# Altium PCB SMPS_PCB.PcbDoc
Units mil, origin at the board's own origin, x right, y up, seen from the top; angles counter-clockwise.
Board outline 2110 x 3425.2 mil, 2 copper layers (Top Layer, Bottom Layer); 23 components, 16 nets, 64 pads, 2 vias.
Unrouted connection lines stored in the file: 1.
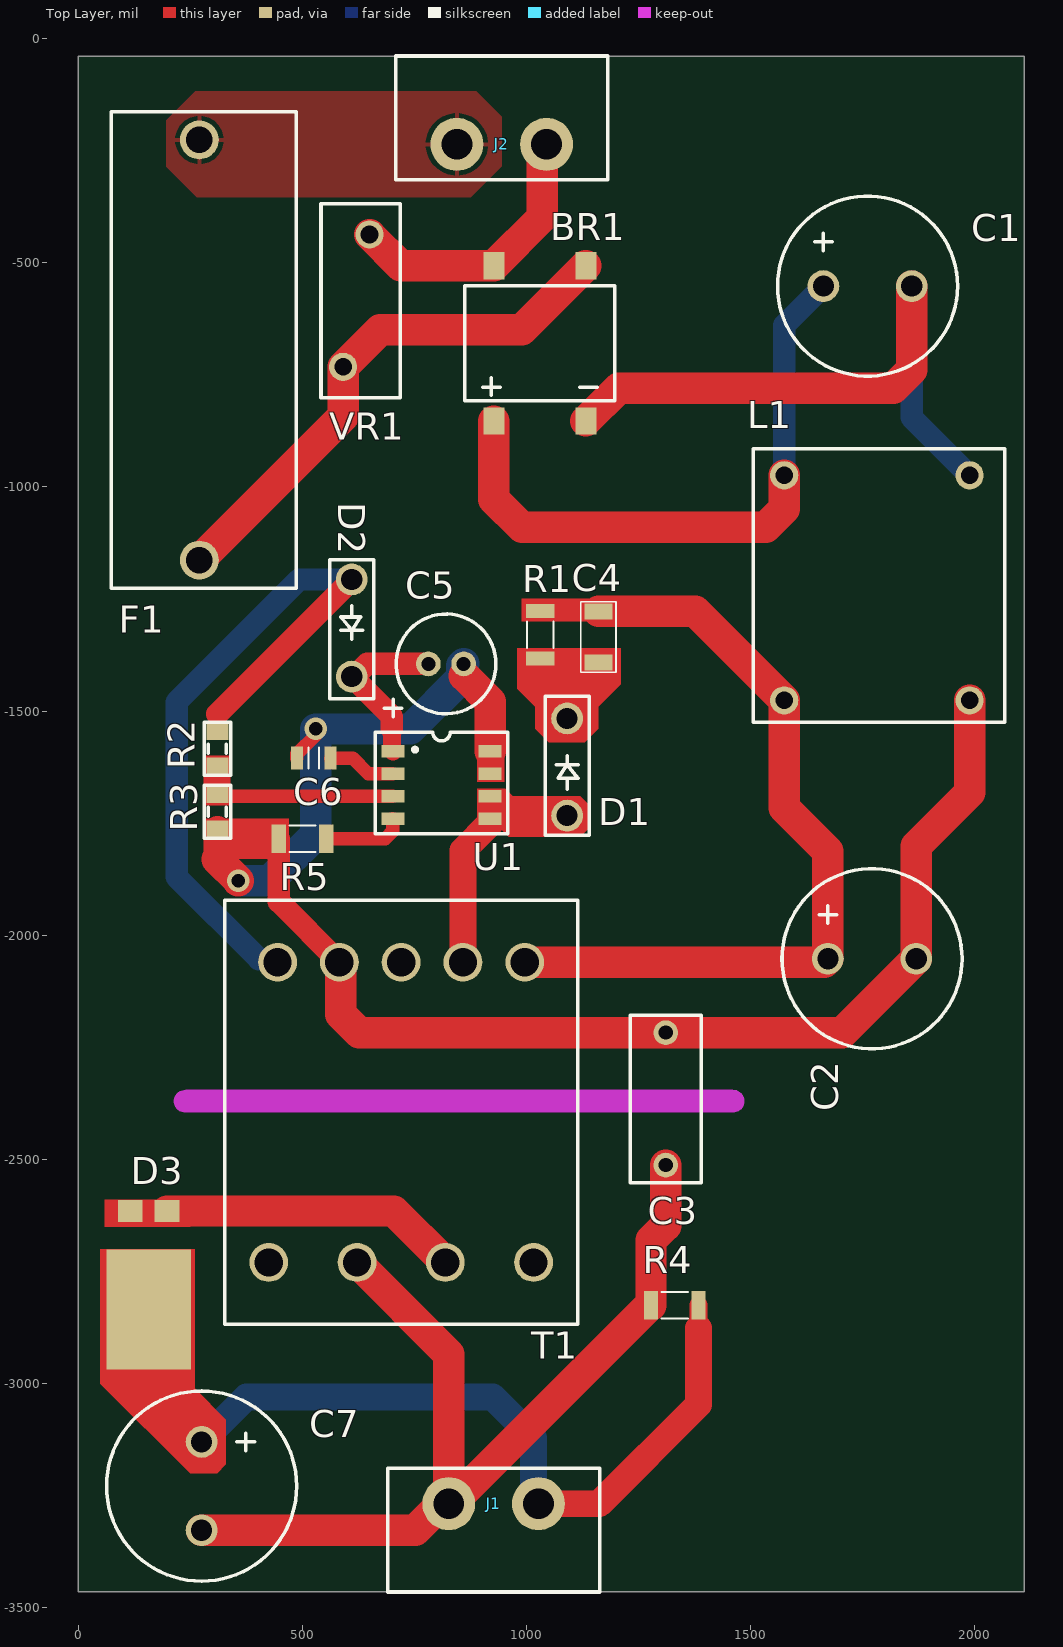
[diagram p0: Top Layer view]
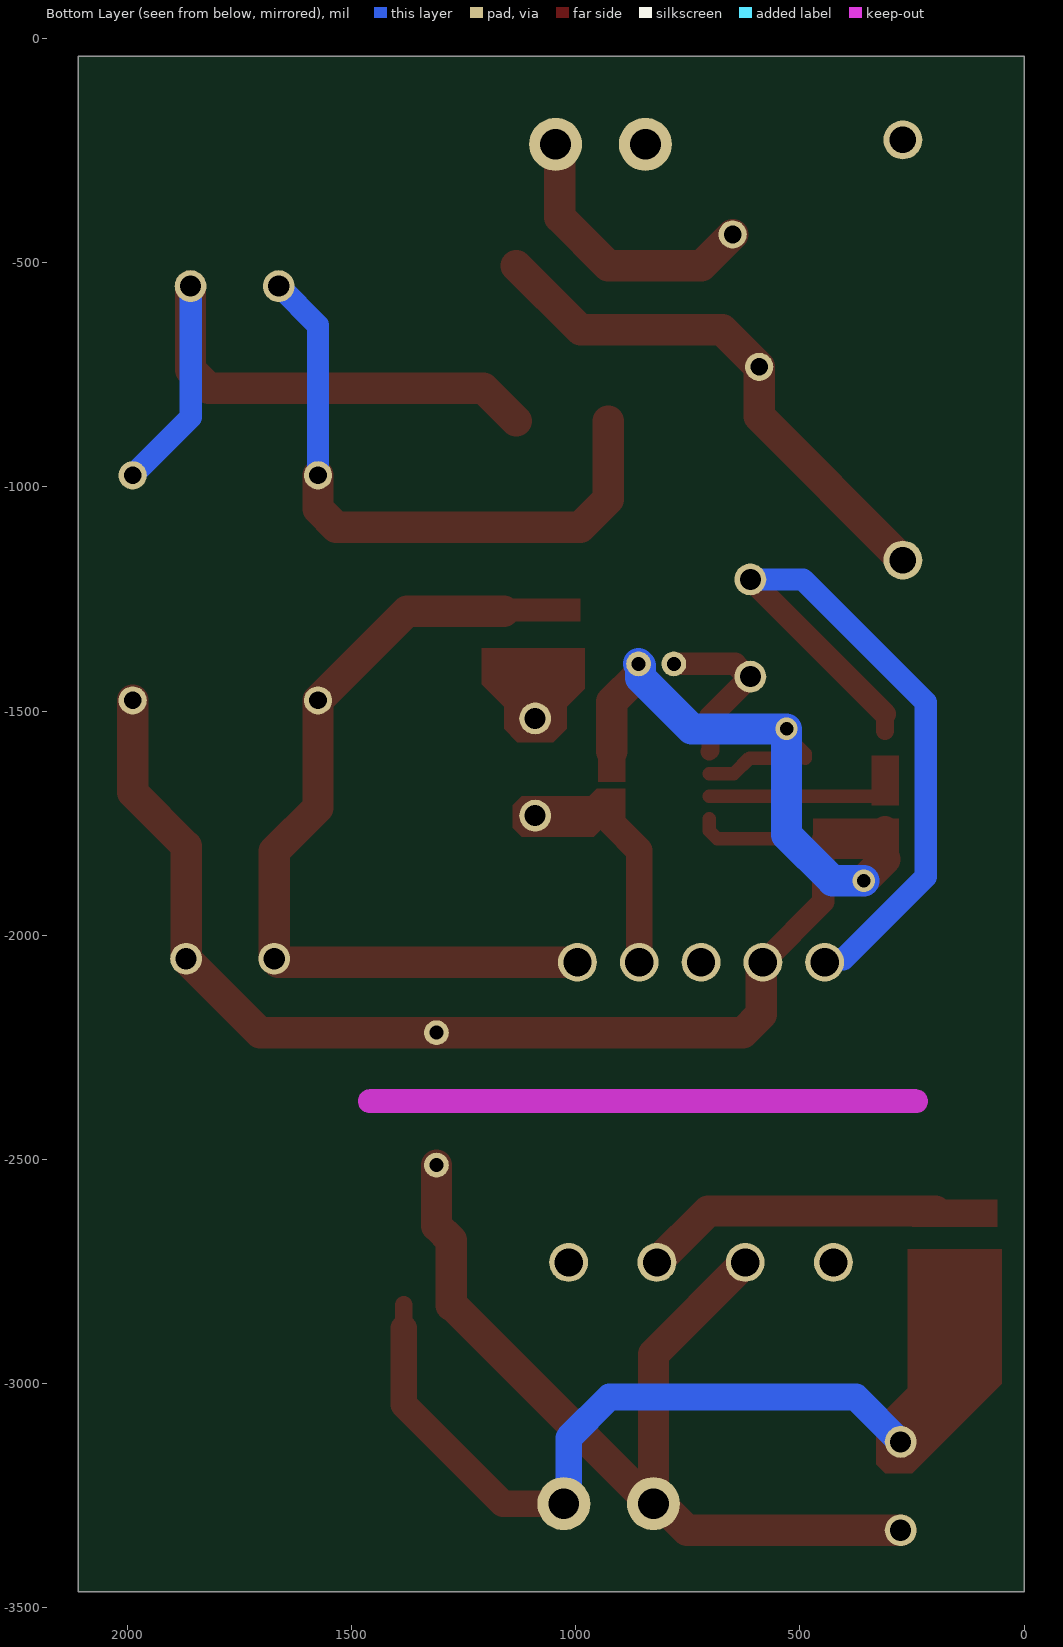
[diagram p1: Bottom Layer view, seen from below]
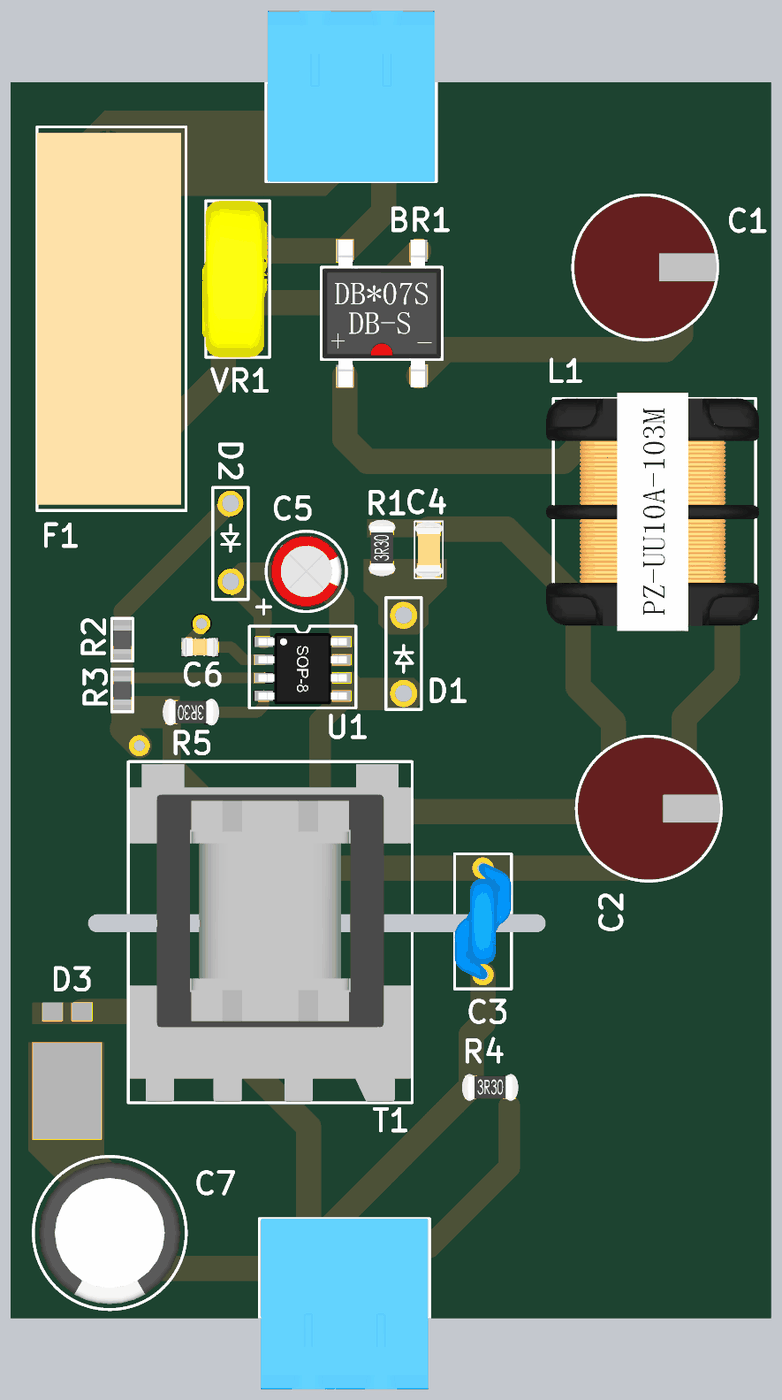
[diagram p2: 3D render of the assembled board from above, using the file's embedded part models]

## Layer stack, top to bottom
Top Solder: solder mask 0.4, Solder Resist, Dk 3.5
Top Layer: signal copper 1.4
Dielectric 1: dielectric 12.6, FR-4, Dk 4.8
Bottom Layer: signal copper 1.4
Bottom Solder: solder mask 0.4, Solder Resist, Dk 3.5

## Board outline
0,-3464.57 2110,-3464.57 2110,-39.37 0,-39.37
cut-out: 240,-2395.02 cw(c240,-2370) 240,-2344.99 1460,-2344.99 cw(c1460,-2370) 1485.01,-2370 cw(c1460,-2370) 1460,-2395.02

## Design rules (kind name [scope] priority, off if disabled: settings)
Clearance [All] p1: gap=11.81 ignorepadtopadclearanceinfootprint=FALSE
PlaneConnect [All] p1: planeconnectstyle=Relief reliefexpansion=40 reliefentries=4 reliefconductorwidth=100 reliefairgap=20
PolygonConnect [All] p1: connectstyle=Relief reliefconductorwidth=20 reliefentries=4 polygonreliefangle="90 Angle" airgapwidth=10
RoutingVias [All] p1: holewidth=28 width=50 viastyle="Through Hole" minholewidth=28 minwidth=50 maxholewidth=28 maxwidth=50
SolderMaskExpansion [All] p1: expansion=4 istentingtop=FALSE
SupplyNets "Schematic Supply Nets_4" [InNet('VOUT-')] p1: voltage=0.000
SupplyNets "Schematic Supply Nets_3" [InNet('IN_GND')] p2: voltage=0.000
SupplyNets "Schematic Supply Nets_2" [InNet('AC_1')] p3: voltage=0.000
SupplyNets "Schematic Supply Nets_1" [InNet('AC_2')] p4: voltage=0.000
Width [All] p1: maxlimit=100 minlimit=11.81 preferedwidth=19.68
29 further rules are at their usual default settings.

## Components (designator, comment, footprint, x,y, rotation, side; value= is the part's Value field where it differs from the comment)
BR1 "DB105STR" DB105STR 1030,-680 r180 top
C1 "UCY2G100MPD1TD" CAP_ALU_10uF 1760.63,-552.44 r0 top value=10uF
C2 "UCY2G150MPD" CAP_ALU_15uF 1770.63,-2052.44 r0 top value=15uF
C3 "DE2E3SA102MN3AT02F" CAP_CER_1000pF_250V_RADİAL 1310.63,-2364.96 r90 top
C4 "C1206C102KDRACTU" CAP_1206 1160.63,-1334.96 r90 top value=1nF
C5 "860010672008" CAP_ALU_4.7uF 820.63,-1394.96 r180 top value=4.7uF
C6 "CL21B104KBCNNNC" CAP_0805 525.61,-1604.96 r180 top value=100nF
C7 "ECA-1AM222" CAP_ALU_2200uF 275.59,-3228.35 r270 top value=2.2mF
D1 "1N4007G-T" "1N4007G-T Diode" 1090.63,-1624.96 r90 top
D2 "1N4007G-T" "1N4007G-T Diode" 610.63,-1314.96 r270 top
D3 "SS10P4-M3/86A SCHOTTKY DİODE" SS10P4-M3/86A 157.48,-2724.8 r180 top
F1 "05200101Z" "05200101Z Fuse Block" 270.63,-694.96 r90 top
J1 "JACK" TBP01R1-508 926.77,-3267.72 r0 top
J2 "JACK" TBP01R1-508 944.88,-236.22 r180 top
L1 "LFU09V-102(0.35MM)" "Line Filter Choke Common Mode" 1771.65,-1220.47 r0 top
R1 "RC1206JR-07200KL" RES-1206 1030.63,-1329.98 r90 top value=200kR
R2 "RMCF0805FT18K0" RES_0805 310.63,-1584.33 r180 top value=18kR
R3 "RC0805FR-7W3K3L" RES_0805 310.63,-1724.96 r180 top value=3.3kR
R4 "RC1206JR-071KL" RES-1206 1330.63,-2824.96 r0 top value=1kR
R5 "RC1206JR-071RL" RES-1206 500.63,-1784.96 r180 top value=1R
T1 "750341599" "SMPS TRAFO" 720.63,-2394.96 r270 top
U1 "UCSR3652SG" sop-8 810.63,-1664.96 r270 top
VR1 "820513011" "820513011 Varistor" 620.63,-584.96 r90 top

## Footprints (in the part's own frame and the unit in brackets; to place one, negate y for a bottom-side part, rotate by r counter-clockwise, add the part's x,y. Pads: shape width x height; smd on the part's side, far side on the other; paste and mask are expansions set on the pad)
"1N4007G-T Diode" [mm] "Rectifier Diode, 1 Phase, 1 Element, 1A, 1000V V(RRM), Silicon, DO-41"
  round 1.8 hole 1.2 mask+0.05: 1(2.75,0) 2(-2.75,0)
  silkscreen extent -3.88,-1.25 4,1.25, body extent -3.32,-0.87 3.16,1.13, height 2.2
"05200101Z Fuse Block" [mm]
  round 2.2 hole 1.5 mask+0.05: 1(-11.9,0) 2(11.9,0)
  silkscreen extent -13.5,-5.5 13.5,5, body extent -13.21,-5.16 13.21,5, height 13.2
"820513011 Varistor" [mm]
  round 1.6 hole 1 mask+0.05: 1(-3.75,0.75) 2(3.75,-0.75)
  silkscreen extent -5.5,-2.5 5.5,2, body extent -5.5,-2.35 5.5,2.25, height 14.5
CAP_0805 [mm]
  rect 0.7x1.3 smd mask+0.05: 1(-0.95,0) 2(0.95,0)
  silkscreen extent -0.3,-0.6 0.3,0.6, body extent -1.3,-0.68 1.3,0.68, height 0.9
CAP_1206 [mm]
  rect 0.9x1.6 smd mask+0.05: 1(-1.45,0) 2(1.45,0)
  silkscreen extent -2,-1 2,1, body extent -1.97,-0.98 1.97,0.98, height 1.3
CAP_ALU_4.7uF [mm] "Aluminum Electrolytic Capacitor, Polarized, Aluminum (wet), 400V, 20% +Tol, 20% -Tol, 10uF"
  round 1.4 hole 0.8 mask+0.05: 1(1,0) 2(-1,0)
  silkscreen extent -2.83,-2.83 3.5,3, body extent -2.49,-2.5 2.5,2.5, height 11.39
CAP_ALU_10uF [mm] "Aluminum Electrolytic Capacitor, Polarized, Aluminum (wet), 400V, 20% +Tol, 20% -Tol, 10uF"
  round 1.8 hole 1.2 mask+0.05: 1(-2.5,0) 2(2.5,0)
  silkscreen extent -5.1,-5.1 5.1,5.1, body extent -5.02,-5 5.02,5, height 17.52
CAP_ALU_15uF [mm] "Aluminum Electrolytic Capacitor, Polarized, Aluminum (wet), 400V, 20% +Tol, 20% -Tol, 15uF"
  round 1.8 hole 1.2 mask+0.05: 1(-2.5,0) 2(2.5,0)
  silkscreen extent -5.1,-5.1 5.1,5.1, body extent -5.02,-5 5.02,5, height 17.52
CAP_ALU_2200uF [mm] "Aluminum Electrolytic Capacitor, Polarized, Aluminum (wet), 10V, 20% +Tol, 20% -Tol, 2200uF, Through Hole Mount"
  round 1.8 hole 1.2 mask+0.05: 1(-2.5,0) 2(2.5,0)
  silkscreen extent -5.39,-5.39 5.39,5.39, body extent -4.98,-5 5,5, height 20.5
CAP_CER_1000pF_250V_RADİAL [mm] "Ceramic Capacitor, Ceramic, 20% +Tol, 20% -Tol, E, -55/+20% TC, 0.001uF, Through Hole Mount"
  round 1.4 hole 0.8 mask+0.05: 1(-3.75,0) 2(3.75,0)
  silkscreen extent -4.75,-2 4.75,2, body extent -4.07,-2 4.07,2, height 9.32
DB105STR [mm]
  rect 1.2x1.55 smd mask+0.05: 1(-2.605,-4.4) 2(2.605,-4.4) 3(2.605,4.4) 4(-2.605,4.4)
  silkscreen extent -4.25,-3.25 4.25,3.25, body extent -4.16,-5.2 4.16,5.2, height 2.66
"Line Filter Choke Common Mode" [mm]
  round 1.6 hole 1 mask+0.05: 1(-5,6.25) 2(5.5,6.25) 3(5.5,-6.5) 4(-5,-6.5)
  silkscreen extent -6.75,-7.75 7.5,7.75, body extent -7.25,-8.63 7.75,8.16, height 16.3
RES-1206 [mm]
  rect 0.8x1.6 smd mask+0.05: 1(-1.345,0) 2(1.345,0)
  silkscreen extent -0.75,-0.75 0.75,0.75, body extent -1.98,-0.94 1.98,0.94, height 0.55
RES_0805 [mm]
  rect 1.25x1 smd mask+0.05: 1(0,1) 2(0,-1)
  silkscreen extent -0.75,-1.5 0.75,1.5, body extent -0.63,-1 0.63,1, height 0.49
"SMPS TRAFO" [mm]
  round 2.2 hole 1.6 mask+0.05: 1(-8.5,7) 2(-8.5,3.5) 3(-8.5,0) 4(-8.5,-3.5) 5(-8.5,-7) 6(8.5,-7.5) 7(8.5,-2.5) 8(8.5,2.5) 9(8.5,7.5)
  silkscreen extent -12,-10 12,10, body extent -11.85,-9.9 11.95,9.9, height 14.85
sop-8 [mm]
  rect 0.7x1.3 smd mask+0.05: 1(-1.905,-2.75) 2(-0.635,-2.75) 3(0.635,-2.75) 4(1.905,-2.75) 5(1.905,2.75) 6(0.635,2.75) 7(-0.635,2.75) 8(-1.905,2.75)
  silkscreen extent -3,-3.75 2.75,3.75, body extent -2.5,-3.1 2.5,3.1, height 1.84
SS10P4-M3/86A [mm] "Rectifier Diode, Schottky, 1 Phase, 1 Element, 10A, 40V V(RRM), Silicon, TO-277A"
  rect 1.4x1.27 smd mask+0.05: 1(-1.04,-2.79) 2(1.04,-2.79)
  rect 4.8x6.8 smd mask+0.05: K(0,2.79)
  body extent -2.5,-3.5 2.5,6.5, height 1
TBP01R1-508 [mm]
  round 3 hole 1.75 mask+0.05: 1(-2.54,0) 2(2.54,0)
  silkscreen extent -6,-5 6,2, body extent -5.88,-10 5.88,2, height 8.6

## Part data
BR1: "Bridge Rect 1PHASE 600V 1A Db-s", Current=1A, Manufacturer="Sangdest Microelectronics", Manufacturer Part Number=DB105S, Supplier Part Number=1655-DB105SCT-ND, Voltage - Peak Reverse (Max)=600V, Category=Uncategorized, ComponentLink1Description=DATASHEET, ComponentLink1URL=https://www.smc-diodes.com/propdf/DB101S%20THRU%20DB107S%20N1459%20REV.B.pdf, Designed by=Kerem, Pricing="1=0,44, 10=0,267, 100=0,1688, 500=0,12602 (USD)", RoHS=No, Stock=8973, Supplier=Digikey
C1: library part CAP_ALU_10uF, "Aluminum Electrolytic Capacitor, Polarized, Aluminum (wet), 400V, 20% +Tol, 20% -Tol, 10uF", Capacitor Type=Aluminium, Manufacturer=Nichicon, Manufacturer Series=CY, Max Operating Temperature=105°C, Min Operating Temperature=-40°C, Package Style=RadialMeter, Rated DC Voltage (URdc)=400V, Ripple Current=150mA, Supplier Part Number=647-UCY2G100MPD1TD, Tolerance  (fill in as +-)=20%, Category="Aluminum Electrolytic Capacitors", ComponentLink1Description=https://datasheet.ciiva.com:443/pdfs/VipMasterIC/IC/NICH/NICH-S-A0009255900/NICH-S-A0009255900-1.pdf?src-supplier=IHS+Markit, ComponentLink1URL=https://datasheet.ciiva.com:443/pdfs/VipMasterIC/IC/NICH/NICH-S-A0009255900/NICH-S-A0009255900-1.pdf?src-supplier=IHS+Markit, ComponentLink2Description=https://datasheet.ciiva.com/29547/e-cy-29547366.pdf?src-supplier=Digikey, ComponentLink2URL=https://datasheet.ciiva.com/29547/e-cy-29547366.pdf?src-supplier=Digikey, ComponentLink3Description=https://datasheet.ciiva.com/29547/e-cy-29547367.pdf?src-supplier=Digikey, ComponentLink3URL=https://datasheet.ciiva.com/29547/e-cy-29547367.pdf?src-supplier=Digikey, Diameter=10mm, Dielectric Material=Aluminium, Length=16mm, Manufacturer Part Number=UCY2G100MPD1TD, Packaging="Tape and Reel", Pins=2, Polarity=Polarized, Pricing="1=1,07, 10=0,539, 50=0,539, 100=0,486, 1000=0,351, 10000=0,295 (USD)", Reach SVHC Compliant=No, RoHS=Yes, RoHS Compliant=Yes, Series=CY, Stock=11094, Supplier=Mouser, Terminal Pitch=5mm, Tolerance (fill in as +-)=20%
C2: library part CAP_ALU_15uF, "Aluminum Electrolytic Capacitor, Polarized, Aluminum (wet), 400V, 20% +Tol, 20% -Tol, 15uF", Capacitor Type=Aluminium, Manufacturer=Nichicon, Max Operating Temperature=105°C, Min Operating Temperature=-40°C, Package Style=RadialMeter, Rated DC Voltage (URdc)=400V, Ripple Current=180mA, Supplier Part Number=647-UCY2G150MPD, Tolerance  (fill in as +-)=20%, Category="Aluminum Electrolytic Capacitors", ComponentLink1Description=https://datasheet.ciiva.com:443/pdfs/VipMasterIC/IC/NICH/NICH-S-A0003527728/NICH-S-A0003527728-1.pdf?src-supplier=IHS+Markit, ComponentLink1URL=https://datasheet.ciiva.com:443/pdfs/VipMasterIC/IC/NICH/NICH-S-A0003527728/NICH-S-A0003527728-1.pdf?src-supplier=IHS+Markit, ComponentLink2Description=https://datasheet.ciiva.com/114/e-cy-114566.pdf?src-supplier=Digikey, ComponentLink2URL=https://datasheet.ciiva.com/114/e-cy-114566.pdf?src-supplier=Digikey, ComponentLink3Description=https://datasheet.ciiva.com/11686/e-cy-11686537.pdf?src-supplier=Avnet, ComponentLink3URL=https://datasheet.ciiva.com/11686/e-cy-11686537.pdf?src-supplier=Avnet, ComponentLink4Description=https://datasheet.ciiva.com/5329/e-cy-8386-5329868.pdf?src-supplier=Mouser, ComponentLink4URL=https://datasheet.ciiva.com/5329/e-cy-8386-5329868.pdf?src-supplier=Mouser, Diameter=10mm, Dielectric Material=Aluminium, JESD-609 Code=e3, Length=20mm, Manufacturer Part Number=UCY2G150MPD, Packaging=Bulk, Pins=2, Polarity=Polarized, Pricing="1=1,25, 10=0,861, 50=0,861, 100=0,632, 1000=0,491, 10000=0,425 (USD)", Reach SVHC Compliant=No, RoHS=Yes, RoHS Compliant=Yes, Stock=1314, Supplier=Mouser, Terminal Finish=Copper, Terminal Pitch=5mm, Tolerance (fill in as +-)=20%
C3: library part CAP_CER_1000pF_250V_RADİAL, "Ceramic Capacitor, Ceramic, 20% +Tol, 20% -Tol, E, -55/+20% TC, 0.001uF, Through Hole Mount", Capacitor Type=Ceramic, Manufacturer=Murata, Supplier Part Number=81-DE2E3SA102MN3AT2F, Category="Ceramic Capacitors", ComponentLink1Description=https://psearch.en.murata.com:443/capacitor/product/DE2E3SA102MN3AT02F.pdf?src-supplier=IHS+Markit, ComponentLink1URL=https://psearch.en.murata.com:443/capacitor/product/DE2E3SA102MN3AT02F.pdf?src-supplier=IHS+Markit, ComponentLink2Description=https://search.murata.co.jp/Ceramy/image/img/A01X/G101/ENG/DE2_SA_T0_F_E.pdf?src-supplier=Digikey, ComponentLink2URL=https://search.murata.co.jp/Ceramy/image/img/A01X/G101/ENG/DE2_SA_T0_F_E.pdf?src-supplier=Digikey, ComponentLink3Description=https://datasheet.octopart.com/DE2E3SA102MN3AT02F-Murata-datasheet-166166228.pdf?src-supplier=TME, ComponentLink3URL=https://datasheet.octopart.com/DE2E3SA102MN3AT02F-Murata-datasheet-166166228.pdf?src-supplier=TME, Dielectric Material=Ceramic, Manufacturer Part Number=DE2E3SA102MN3AT02F, Pins=2, Pricing="1=0,49, 10=0,297, 50=0,297, 100=0,145, 1000=0,11, 10000=0,109 (USD)", Reach SVHC Compliant=Yes, RoHS=Yes, RoHS Compliant=Yes, Stock=12396, Supplier=Mouser
C4: library part CAP_CER_1nF_1206, "Ceramic Capacitor, Multilayer, Ceramic, 1000V, 10% +Tol, 10% -Tol, X7R, 15% TC, 0.001uF, Surface Mount, 1206", Capacitor Type=Ceramic, Case/Package=1206, Manufacturer=KEMET, Max Operating Temperature=125°C, Min Operating Temperature=-55°C, Package Shape=Rectangular, Package Style=SMTMeter, Rated DC Voltage (URdc)=1kV, Supplier Part Number=80-C1206C102KDR, Temperature Characteristics Code=X7R, Tolerance  (fill in as +-)=10%, Category="Ceramic Capacitors", ComponentLink1Description=https://datasheet.ciiva.com:443/pdfs/VipMasterIC/IC/KEME/KEME-S-A0007630859/KEME-S-A0007630859-1.pdf?src-supplier=IHS+Markit, ComponentLink1URL=https://datasheet.ciiva.com:443/pdfs/VipMasterIC/IC/KEME/KEME-S-A0007630859/KEME-S-A0007630859-1.pdf?src-supplier=IHS+Markit, ComponentLink2Description=https://datasheet.ciiva.com/19476/1567931-19476446.pdf?src-supplier=Jameco, ComponentLink2URL=https://datasheet.ciiva.com/19476/1567931-19476446.pdf?src-supplier=Jameco, ComponentLink3Description=https://datasheet.ciiva.com/22700/1812017-22700535.pdf?src-supplier=Element14, ComponentLink3URL=https://datasheet.ciiva.com/22700/1812017-22700535.pdf?src-supplier=Element14, ComponentLink4Description=https://datasheet.ciiva.com/28610/1918693-28610894.pdf?src-supplier=Element14, ComponentLink4URL=https://datasheet.ciiva.com/28610/1918693-28610894.pdf?src-supplier=Element14, Dielectric Material=Ceramic, Height=1.2mm, JESD-609 Code=e3, Length=3.2mm, Manufacturer Part Number=C1206C102KDRACTU, Mounting Technology="Surface Mount", Multilayer=Yes, Packaging="Tape and Reel", Pins=2, Pricing="1=0,23, 10=0,114, 50=0,114, 100=0,068, 1000=0,049, 10000=0,036 (USD)", Reach SVHC Compliant=Yes, RoHS=Yes, RoHS Compliant=Yes, Stock=27008, Supplier=Mouser, Terminal Finish=Nickel, Termination=Wraparound, Tolerance (fill in as +-)=10%, Width=1.6mm
C5: library part CAP_ALU_4.7uF, "Aluminum Electrolytic Capacitor, Aluminum (wet)", Capacitor Type=Aluminium, Manufacturer="Wurth Electronics", Supplier Part Number=710-860010672008, Category="Aluminum Electrolytic Capacitors", ComponentLink1Description=https://datasheet.ciiva.com:443/pdfs/VipMasterIC/IC/MIDC/MIDC-S-A0000765238/MIDC-S-A0000765796-1.pdf?src-supplier=IHS+Markit, ComponentLink1URL=https://datasheet.ciiva.com:443/pdfs/VipMasterIC/IC/MIDC/MIDC-S-A0000765238/MIDC-S-A0000765796-1.pdf?src-supplier=IHS+Markit, ComponentLink2Description=http://www.farnell.com/datasheets/1879575.pdf?src-supplier=Farnell, ComponentLink2URL=http://www.farnell.com/datasheets/1879575.pdf?src-supplier=Farnell, ComponentLink3Description=http://www.produktinfo.conrad.com/datenblaetter/1200000-1299999/001280181-da-01-en-WCAP_ATG8_ALU_ELEC_CAPS_860010672008.pdf?src-supplier=Conrad, ComponentLink3URL=http://www.produktinfo.conrad.com/datenblaetter/1200000-1299999/001280181-da-01-en-WCAP_ATG8_ALU_ELEC_CAPS_860010672008.pdf?src-supplier=Conrad, ComponentLink4Description=http://katalog.we-online.de/pbs/datasheet/860010672008.pdf?src-supplier=Digikey, ComponentLink4URL=http://katalog.we-online.de/pbs/datasheet/860010672008.pdf?src-supplier=Digikey, ComponentLink5Description=http://www.farnell.com/datasheets/1879575.pdf?src-supplier=Element14, ComponentLink5URL=http://www.farnell.com/datasheets/1879575.pdf?src-supplier=Element14, Dielectric Material=Aluminium, Manufacturer Part Number=860010672008, Pins=2, Pricing="1=0,11, 10=0,11, 50=0,096, 100=0,084, 1000=0,056, 10000=0,055 (USD)", Reach SVHC Compliant=Yes, RoHS=Yes, RoHS Compliant=Yes, Stock=5183, Supplier=Mouser
C6: library part CAP_CER_0.1uF_0805, "Ceramic Capacitor,50V, %10, 0.1uF, Surface Mount, 0805", Capacitor Type=Ceramic, Case/Package=0805, Manufacturer=Samsung, Max Operating Temperature=125°C, Min Operating Temperature=-55°C, Package Shape=Rectangular, Package Style=SMTMeter, Rated DC Voltage (URdc)=50V, Supplier Part Number=1276-1003-1-ND, Temperature Characteristics Code=X7R, Tolerance  (fill in as +-)=10%, Category="Ceramic Capacitors", ComponentLink1Description=https://datasheet.ciiva.com:443/pdfs/VipMasterIC/IC/SEMS/SEMS-S-A0008521003/SEMS-S-A0008521039-1.pdf?src-supplier=IHS+Markit, ComponentLink1URL=https://datasheet.ciiva.com:443/pdfs/VipMasterIC/IC/SEMS/SEMS-S-A0008521003/SEMS-S-A0008521039-1.pdf?src-supplier=IHS+Markit, ComponentLink2Description=https://datasheet.ciiva.com/25710/cl21b104kbcnnnc-25710182.pdf?src-supplier=Digikey, ComponentLink2URL=https://datasheet.ciiva.com/25710/cl21b104kbcnnnc-25710182.pdf?src-supplier=Digikey, ComponentLink3Description=https://datasheet.ciiva.com/29199/454152-da-01-en-vs-kondensator-0805-29199814.pdf?src-supplier=Conrad, ComponentLink3URL=https://datasheet.ciiva.com/29199/454152-da-01-en-vs-kondensator-0805-29199814.pdf?src-supplier=Conrad, Designed by=Kerem, Dielectric Material=Ceramic, Height=0.95mm, JESD-609 Code=e3, Length=2mm, Manufacturer Part Number=CL21B104KBCNNNC, Mounting Technology="Surface Mount", Multilayer=Yes, Packaging="Tape and Reel", Pins=2, Pricing="1=0,1, 10=0,029, 100=0,0175, 1000=0,01156 (USD)", Reach SVHC Compliant=Yes, RoHS=Yes, RoHS Compliant=Yes, Stock=925106, Supplier=Digikey, Terminal Finish=Nickel, Termination=Wraparound, Tolerance (fill in as +-)=10%, Width=1.25mm
C7: library part CAP_ALU_2200uF, "Aluminum Electrolytic Capacitor, Polarized, Aluminum (wet), 10V, 20% +Tol, 20% -Tol, 2200uF, Through Hole Mount", Capacitor Type=Aluminium, Leakage Current=220uA, Manufacturer=Panasonic, Manufacturer Series=M, Max Operating Temperature=85°C, Min Operating Temperature=-40°C, Package Shape=Cylindrical, Package Style=RadialMeter, Rated DC Voltage (URdc)=10V, Ripple Current=920mA, Supplier Part Number=667-ECA-1AM222, Tolerance  (fill in as +-)=20%, Category="Aluminum Electrolytic Capacitors", ComponentLink1Description=https://datasheet.ciiva.com:443/pdfs/VipMasterIC/IC/PANA/PANA-S-A0009459698/PANA-S-A0009459698-1.pdf?src-supplier=IHS+Markit, ComponentLink1URL=https://datasheet.ciiva.com:443/pdfs/VipMasterIC/IC/PANA/PANA-S-A0009459698/PANA-S-A0009459698-1.pdf?src-supplier=IHS+Markit, ComponentLink2Description=https://datasheet.ciiva.com/11780/0900766b80f2e8a9-11780233.pdf?src-supplier=Rs, ComponentLink2URL=https://datasheet.ciiva.com/11780/0900766b80f2e8a9-11780233.pdf?src-supplier=Rs, ComponentLink3Description=https://datasheet.ciiva.com/43458/654936-43458312.pdf?src-supplier=Farnell, ComponentLink3URL=https://datasheet.ciiva.com/43458/654936-43458312.pdf?src-supplier=Farnell, ComponentLink4Description=https://datasheet.ciiva.com/10331/aba0000ce12-10331145.pdf?src-supplier=Avnet, ComponentLink4URL=https://datasheet.ciiva.com/10331/aba0000ce12-10331145.pdf?src-supplier=Avnet, ComponentLink5Description=https://datasheet.ciiva.com/48520/radial-m-eng-tds-48520751.pdf?src-supplier=Distrelec, ComponentLink5URL=https://datasheet.ciiva.com/48520/radial-m-eng-tds-48520751.pdf?src-supplier=Distrelec, ComponentLink6Description=https://datasheet.ciiva.com/30083/49aba0000ce12-30083103.pdf?src-supplier=Onlinecomponents.com, ComponentLink6URL=https://datasheet.ciiva.com/30083/49aba0000ce12-30083103.pdf?src-supplier=Onlinecomponents.com, ComponentLink7Description=https://datasheet.ciiva.com/46387/654936-46387400.pdf?src-supplier=Element14, ComponentLink7URL=https://datasheet.ciiva.com/46387/654936-46387400.pdf?src-supplier=Element14, ComponentLink8Description=https://datasheet.ciiva.com/24027/aba0000ce12-465472-24027112.pdf?src-supplier=Mouser, ComponentLink8URL=https://datasheet.ciiva.com/24027/aba0000ce12-465472-24027112.pdf?src-supplier=Mouser, ComponentLink9Description=https://datasheet.ciiva.com/16395/aba0000ce12-16395615.pdf?src-supplier=Future+Electronics, ComponentLink9URL=https://datasheet.ciiva.com/16395/aba0000ce12-16395615.pdf?src-supplier=Future+Electronics, Diameter=10mm, Dielectric Material=Aluminium, JESD-609 Code=e3, Length=20mm, Manufacturer Part Number=ECA-1AM222, Mounting Technology="Through Hole", Packaging=Bulk, Pins=2, Polarity=Polarized, Pricing="1=0,63, 10=0,297, 50=0,297, 100=0,23, 1000=0,186, 10000=0,167 (USD)", Reach SVHC Compliant=Yes, RoHS=Yes, RoHS Compliant=Yes, Series=ECA-M, Stock=2404, Supplier=Mouser, Tan Delta=0.26, Terminal Finish=Tin, Terminal Pitch=5mm, Termination=Wire, Tolerance (fill in as +-)=20%
D1 D2: library part "1N4007G-T Diode", "Rectifier Diode, 1 Phase, 1 Element, 1A, 1000V V(RRM), Silicon, DO-41", Case Connection=Isolated, Forward Voltage=1V, Manufacturer=Diodes, Max Operating Temperature=175°C, Max Output current=1A, Min Operating Temperature=-65°C, Non-rep Pk Forward Current-Max=30A, Package Body Material=Plastic, Package Shape=Round, Package Style="LONG FORMMeter", Peak Reflow Temperature (Cel)=260°C, Rep Pk Reverse Voltage-Max=1kV, Supplier Part Number=621-1N4007G-T, Time @ Peak Reflow Temperature-Max (s)=40s, Category="Rectifier Diodes", ComponentLink1Description=https://datasheet.ciiva.com:443/pdfs/VipMasterIC/IC/DIOD/DIODS14380/DIODS14380-1.pdf?src-supplier=IHS+Markit, ComponentLink1URL=https://datasheet.ciiva.com:443/pdfs/VipMasterIC/IC/DIOD/DIODS14380/DIODS14380-1.pdf?src-supplier=IHS+Markit, ComponentLink2Description=https://datasheet.ciiva.com/36525/1537942-36525995.pdf?src-supplier=Jameco, ComponentLink2URL=https://datasheet.ciiva.com/36525/1537942-36525995.pdf?src-supplier=Jameco, ComponentLink3Description=https://datasheet.ciiva.com/912/ds29002-912230.pdf?src-supplier=Digikey, ComponentLink3URL=https://datasheet.ciiva.com/912/ds29002-912230.pdf?src-supplier=Digikey, ComponentLink4Description=https://datasheet.ciiva.com/15219/getdatasheetpartid-213960-15219547.pdf?src-supplier=Verical, ComponentLink4URL=https://datasheet.ciiva.com/15219/getdatasheetpartid-213960-15219547.pdf?src-supplier=Verical, ComponentLink5Description=https://datasheet.ciiva.com/16395/ds29002-16395514.pdf?src-supplier=Future+Electronics, ComponentLink5URL=https://datasheet.ciiva.com/16395/ds29002-16395514.pdf?src-supplier=Future+Electronics, Diode Element Material=SILICON, Diode Type=RECTIFIER, JEDEC-95 Code=DO-41, JESD-30 Code=O-PALF-W2, JESD-609 Code=e3, Manufacturer Part Number=1N4007G-T, Number of Elements=1, Pins=2, Pricing="1=0,16, 10=0,097, 50=0,097, 100=0,08, 1000=0,051, 10000=0,05 (USD)", Qualification Status="Not Qualified", Reach SVHC Compliant=No, Reverse Recovery Time-Max=2us, RoHS=Yes, RoHS Compliant=Yes, Stock=124927, Supplier=Mouser, Surface Mount=No, Terminal Finish=Tin, Terminal Form=Wire, Terminal Position=AXIAL
D3: library part SS10P4-M3/86A, "Rectifier Diode, Schottky, 1 Phase, 1 Element, 10A, 40V V(RRM), Silicon, TO-277A", Manufacturer="Vishay Semiconductors", Supplier Part Number=625-SS10P4-M3, Category="Rectifier Diodes", ComponentLink1Description=https://datasheet.ciiva.com:443/pdfs/VipMasterIC/IC/VISH/VISH-S-A0007701170/VISH-S-A0007701170-1.pdf?src-supplier=IHS+Markit, ComponentLink1URL=https://datasheet.ciiva.com:443/pdfs/VipMasterIC/IC/VISH/VISH-S-A0007701170/VISH-S-A0007701170-1.pdf?src-supplier=IHS+Markit, ComponentLink2Description=https://datasheet.ciiva.com/22685/1719836-22685698.pdf?src-supplier=Element14, ComponentLink2URL=https://datasheet.ciiva.com/22685/1719836-22685698.pdf?src-supplier=Element14, ComponentLink3Description=https://datasheet.ciiva.com/4245/ss10p4-4245882.pdf?src-supplier=Arrow+Electronics, ComponentLink3URL=https://datasheet.ciiva.com/4245/ss10p4-4245882.pdf?src-supplier=Arrow+Electronics, ComponentLink4Description=https://datasheet.ciiva.com/911/ss10p4-911286.pdf?src-supplier=Digikey, ComponentLink4URL=https://datasheet.ciiva.com/911/ss10p4-911286.pdf?src-supplier=Digikey, ComponentLink5Description=https://datasheet.ciiva.com/911/ss10p4-911287.pdf?src-supplier=Digikey, ComponentLink5URL=https://datasheet.ciiva.com/911/ss10p4-911287.pdf?src-supplier=Digikey, ComponentLink6Description=https://datasheet.ciiva.com/911/ss10p4-911288.pdf?src-supplier=Digikey, ComponentLink6URL=https://datasheet.ciiva.com/911/ss10p4-911288.pdf?src-supplier=Digikey, ComponentLink7Description=https://datasheet.ciiva.com/16489/ss10p4-16489287.pdf?src-supplier=Future+Electronics, ComponentLink7URL=https://datasheet.ciiva.com/16489/ss10p4-16489287.pdf?src-supplier=Future+Electronics, Manufacturer Part Number=SS10P4-M3/86A, Pricing="1=0,93, 10=0,645, 50=0,645, 100=0,521, 1000=0,284, 10000=0,275 (USD)", RoHS=No, Stock=7172, Supplier=Mouser
F1: library part "05200101Z Fuse Block", "Fuses/Accessories", Manufacturer=Littelfuse, Supplier Part Number=576-05200101Z, Amper=1A, Category="Fuse Holders", ComponentLink1Description=https://datasheet.ciiva.com:443/pdfs/VipMasterIC/IC/LFSI/LFSI-S-A0002252627/LFSI-S-A0002252627-1.pdf?src-supplier=IHS+Markit, ComponentLink1URL=https://datasheet.ciiva.com:443/pdfs/VipMasterIC/IC/LFSI/LFSI-S-A0002252627/LFSI-S-A0002252627-1.pdf?src-supplier=IHS+Markit, ComponentLink2Description=https://datasheet.ciiva.com/19458/1712608-19458493.pdf?src-supplier=Jameco, ComponentLink2URL=https://datasheet.ciiva.com/19458/1712608-19458493.pdf?src-supplier=Jameco, ComponentLink3Description=https://datasheet.ciiva.com/295/520-metricomniblock-295549.pdf?src-supplier=Digikey, ComponentLink3URL=https://datasheet.ciiva.com/295/520-metricomniblock-295549.pdf?src-supplier=Digikey, ComponentLink4Description=https://datasheet.ciiva.com/16300/0105-129-clips-16300344.pdf?src-supplier=Future+Electronics, ComponentLink4URL=https://datasheet.ciiva.com/16300/0105-129-clips-16300344.pdf?src-supplier=Future+Electronics, ComponentLink5Description=https://datasheet.ciiva.com/15187/getdatasheetpartid-115097-15187901.pdf?src-supplier=Verical, ComponentLink5URL=https://datasheet.ciiva.com/15187/getdatasheetpartid-115097-15187901.pdf?src-supplier=Verical, ComponentLink6Description=https://datasheet.ciiva.com/4480/520-metricomniblock-4480158.pdf?src-supplier=Mouser, ComponentLink6URL=https://datasheet.ciiva.com/4480/520-metricomniblock-4480158.pdf?src-supplier=Mouser, Manufacturer Part Number=05200101Z, Pricing="1=1,6, 10=1,12, 50=0,908, 100=0,863, 1000=0,718, 10000=0,679 (USD)", RoHS=Yes, Stock=10761, Supplier=Mouser
J1 J2: library part TBP01R1-508-02BE, "Strip Terminal Block 2 Pins", Manufacturer="CUI Devices", Supplier Part Number=102-6406-ND, Category="Terminal Blocks", ComponentLink1Description=https://www.cuidevices.com/product/resource/digikeypdf/tbp01r1-508.pdf?src-supplier=Digikey, ComponentLink1URL=https://www.cuidevices.com/product/resource/digikeypdf/tbp01r1-508.pdf?src-supplier=Digikey, ComponentLink2Description=https://datasheet.octopart.com/TBP01R1-508-02BE-CUI-Devices-datasheet-147843976.pdf?src-supplier=Future+Electronics, ComponentLink2URL=https://datasheet.octopart.com/TBP01R1-508-02BE-CUI-Devices-datasheet-147843976.pdf?src-supplier=Future+Electronics, ComponentLink3Description=https://datasheet.octopart.com/TBP01R1-508-02BE-CUI-Devices-datasheet-154730754.pdf?src-supplier=Electro+Sonic, ComponentLink3URL=https://datasheet.octopart.com/TBP01R1-508-02BE-CUI-Devices-datasheet-154730754.pdf?src-supplier=Electro+Sonic, Designed by=Kerem, Manufacturer Part Number=TBP01R1-508-02BE, Pricing="1=0,47, 10=0,218, 25=0,1684, 50=0,1412, 100=0,121, 400=0,09438, 800=0,08583, 1200=0,08184, 5200=0,0775 (USD)", RoHS=Yes, Stock=90039, Supplier=Digikey
L1: library part "Line Filter Choke Common Mode"
R1: library part "RES_200K OHM_1206", "Fixed Resistor, Metal Glaze/thick Film, 0.25W, 200000ohm, 200V, 5% +/-Tol, 100ppm/Cel, Surface Mount, 1206", Case/Package=1206, Manufacturer=Yageo, Max Operating Temperature=155°C, Min Operating Temperature=-55°C, Package Height=0.55mm, Package Length=3.1mm, Package Shape=Rectangular, Package Width=1.6mm, Power=250mW, Rated Temperature=70°C, Resistor Type="FIXED RESISTOR", Temperature Coefficient (ppm/Cel)=100, Tolerance=5%, Working Voltage=200V, Additional Feature="LASER TRIMMABLE", Category="Chip SMD Resistors", ComponentLink1Description=https://datasheet.ciiva.com:443/pdfs/VipMasterIC/IC/YAGO/YAGO-S-A0008145938/YAGO-S-A0008145938-1.pdf?src-supplier=IHS+Markit, ComponentLink1URL=https://datasheet.ciiva.com:443/pdfs/VipMasterIC/IC/YAGO/YAGO-S-A0008145938/YAGO-S-A0008145938-1.pdf?src-supplier=IHS+Markit, ComponentLink2Description=https://datasheet.ciiva.com/2520/pyu-r-int-thick-7-2520646.pdf?src-supplier=Digikey, ComponentLink2URL=https://datasheet.ciiva.com/2520/pyu-r-int-thick-7-2520646.pdf?src-supplier=Digikey, ComponentLink3Description=https://datasheet.ciiva.com/16746/pyu-rc1206-51-rohs-l-4-16746043.pdf?src-supplier=Future+Electronics, ComponentLink3URL=https://datasheet.ciiva.com/16746/pyu-rc1206-51-rohs-l-4-16746043.pdf?src-supplier=Future+Electronics, ComponentLink4Description=https://datasheet.ciiva.com/2520/pyu-r-int-thick-7-2520645.pdf?src-supplier=Digikey, ComponentLink4URL=https://datasheet.ciiva.com/2520/pyu-r-int-thick-7-2520645.pdf?src-supplier=Digikey, Construction=Chip, JESD-609 Code=e3, Manufacturer Part Number=RC1206JR-07200KL, Mounting Technology="Surface Mount", Packaging="Tape and Reel", Pins=2, Pricing="5000=0,00353, 10000=0,00345, 20000=0,00338, 30000=0,00331, 40000=0,00326 (USD)", Reach SVHC Compliant=Yes, RoHS=Yes, RoHS Compliant=Yes, Stock=5000, Supplier=Avnet, Supplier Part Number=RC1206JR-07200KL, Technology="METAL GLAZE/THICK FILM", Terminal Finish=Nickel, Termination=Wraparound
R2: library part "RES_18K OHM_0805", "Fixed Resistor, Metal Glaze/thick Film, 0.125W, 18000ohm, 150V, 1% +/-Tol, 100ppm/Cel, Surface Mount, 0805", Case/Package=0805, Manufacturer="Stackpole Electronics", Max Operating Temperature=155°C, Min Operating Temperature=-55°C, Package Height=0.5mm, Package Length=2mm, Package Shape=Rectangular, Package Width=1.25mm, Power=125mW, Rated Temperature=70°C, Resistor Type="FIXED RESISTOR", Temperature Coefficient (ppm/Cel)=100, Tolerance=1%, Working Voltage=150V, Category="Chip SMD Resistors", ComponentLink1Description=https://datasheet.ciiva.com:443/pdfs/VipMasterIC/IC/SEIE/SEIE-S-A0009541969/SEIE-S-A0009541969-1.pdf?src-supplier=IHS+Markit, ComponentLink1URL=https://datasheet.ciiva.com:443/pdfs/VipMasterIC/IC/SEIE/SEIE-S-A0009541969/SEIE-S-A0009541969-1.pdf?src-supplier=IHS+Markit, ComponentLink2Description=http://www.seielect.com/Catalog/SEI-RMCF_RMCP.pdf?src-supplier=Digikey, ComponentLink2URL=http://www.seielect.com/Catalog/SEI-RMCF_RMCP.pdf?src-supplier=Digikey, ComponentLink3Description=https://www.seielect.com/catalog/sei-rmcf_rmcp.pdf?src-supplier=Digikey, ComponentLink3URL=https://www.seielect.com/catalog/sei-rmcf_rmcp.pdf?src-supplier=Digikey, ComponentLink4Description=https://www.seielect.com/catalog/SEI-RMCF_RMCP.pdf?src-supplier=Avnet, ComponentLink4URL=https://www.seielect.com/catalog/SEI-RMCF_RMCP.pdf?src-supplier=Avnet, ComponentLink5Description=https://datasheet.octopart.com/RMCF0805FT18K0-Stackpole-Electronics-datasheet-12534581.pdf?src-supplier=Future+Electronics, ComponentLink5URL=https://datasheet.octopart.com/RMCF0805FT18K0-Stackpole-Electronics-datasheet-12534581.pdf?src-supplier=Future+Electronics, ComponentLink6Description=https://datasheet.octopart.com/RMCF0805FT18K0-Stackpole-Electronics-datasheet-141193804.pdf?src-supplier=Master+Electronics, ComponentLink6URL=https://datasheet.octopart.com/RMCF0805FT18K0-Stackpole-Electronics-datasheet-141193804.pdf?src-supplier=Master+Electronics, Construction=Rectangular, JESD-609 Code=e3, Manufacturer Part Number=RMCF0805FT18K0, Mounting Technology="Surface Mount", Packaging="Tape and Reel", Pins=2, Pricing="5000=0,00245, 10000=0,00241, 20000=0,00238, 30000=0,00234, 40000=0,0023 (USD)", Reach SVHC Compliant=Yes, Reference Standard=AEC-Q200, RoHS=Yes, RoHS Compliant=Yes, Stock=15000, Supplier=Avnet, Supplier Part Number=RMCF0805FT18K0, Technology="METAL GLAZE/THICK FILM", Terminal Finish=Nickel, Termination=Wraparound
R3: library part "RES_3K3 OHM_0805", "3.3 kOhms ±1% 0.25W, 1/4W Chip Resistor 0805 (2012 Metric) Moisture Resistant Thick Film", Case/Package=0805, Manufacturer=Yageo, Max Operating Temperature=155°C, Min Operating Temperature=-55°C, Package Height=0.5mm, Package Length=2mm, Package Shape=Rectangular, Package Width=1.25mm, Power=250mW, Rated Temperature=70°C, Resistor Type="FIXED RESISTOR", Supplier Part Number=603-RC0805FR-7W3K3L, Temperature Coefficient (ppm/Cel)=200, Tolerance=1%, Working Voltage=150V, Additional Feature="LASER TRIMMABLE", Category="Chip SMD Resistors", ComponentLink1Description=https://datasheet.ciiva.com:443/pdfs/VipMasterIC/IC/YAGO/YAGO-S-A0008145938/YAGO-S-A0008145938-1.pdf?src-supplier=IHS+Markit, ComponentLink1URL=https://datasheet.ciiva.com:443/pdfs/VipMasterIC/IC/YAGO/YAGO-S-A0008145938/YAGO-S-A0008145938-1.pdf?src-supplier=IHS+Markit, Construction=Chip, JESD-609 Code=e3, Manufacturer Part Number=RC0805FR-7W3K3L, Mounting Technology="Surface Mount", Packaging="Tape and Reel", Pins=2, Pricing="1=0,12, 10=0,057, 50=0,057, 100=0,044, 1000=0,031, 10000=0,016 (USD)", Reach SVHC Compliant=Yes, RoHS=Yes, RoHS Compliant=Yes, Stock=4448, Supplier=Mouser, Technology="METAL GLAZE/THICK FILM", Terminal Finish=Nickel, Termination=Wraparound
R4: library part "RES_1K OHM_1206", "Fixed Resistor, Metal Glaze/thick Film, 0.25W, 1000ohm, 200V, 5% +/-Tol, 100ppm/Cel, Surface Mount, 1206", Case/Package=1206, Manufacturer=Yageo, Max Operating Temperature=155°C, Min Operating Temperature=-55°C, Package Height=0.55mm, Package Length=3.1mm, Package Shape=Rectangular, Package Width=1.6mm, Power=250mW, Rated Temperature=70°C, Resistor Type="FIXED RESISTOR", Supplier Part Number=4749537, Temperature Coefficient (ppm/Cel)=100, Tolerance=5%, Working Voltage=200V, Additional Feature="LASER TRIMMABLE", Category="Chip SMD Resistors", ComponentLink1Description=https://datasheet.ciiva.com:443/pdfs/VipMasterIC/IC/YAGO/YAGO-S-A0008145938/YAGO-S-A0008145938-1.pdf?src-supplier=IHS+Markit, ComponentLink1URL=https://datasheet.ciiva.com:443/pdfs/VipMasterIC/IC/YAGO/YAGO-S-A0008145938/YAGO-S-A0008145938-1.pdf?src-supplier=IHS+Markit, ComponentLink2Description=https://datasheet.ciiva.com/2458/pyu-r-int-thick-7-2458671.pdf?src-supplier=Digikey, ComponentLink2URL=https://datasheet.ciiva.com/2458/pyu-r-int-thick-7-2458671.pdf?src-supplier=Digikey, Construction=Chip, JESD-609 Code=e3, Manufacturer Part Number=RC1206JR-071KL, Mounting Technology="Surface Mount", Packaging="Tape and Reel", Pins=2, Pricing="5000=0,0029, 25000=0,0028, 100000=0,0027, 250000=0,0026, 625000=0,0025 (USD)", Reach SVHC Compliant=Yes, RoHS=Yes, RoHS Compliant=Yes, Stock=780000, Supplier="Future Electronics", Technology="METAL GLAZE/THICK FILM", Terminal Finish=Nickel, Termination=Wraparound
R5: library part "RES_1 OHM_1206", "Fixed Resistor, Metal Glaze/thick Film, 0.25W, 1ohm, 200V, 5% +/-Tol, 200ppm/Cel, Surface Mount, 1206", Case/Package=1206, Manufacturer=Yageo, Max Operating Temperature=155°C, Min Operating Temperature=-55°C, Package Height=0.55mm, Package Length=3.1mm, Package Shape=Rectangular, Package Width=1.6mm, Power=250mW, Rated Temperature=70°C, Resistor Type="FIXED RESISTOR", Supplier Part Number=5918024, Temperature Coefficient (ppm/Cel)=200, Tolerance=5%, Working Voltage=200V, Additional Feature="LASER TRIMMABLE", Category="Chip SMD Resistors", ComponentLink1Description=https://datasheet.ciiva.com:443/pdfs/VipMasterIC/IC/YAGO/YAGO-S-A0008145938/YAGO-S-A0008145938-1.pdf?src-supplier=IHS+Markit, ComponentLink1URL=https://datasheet.ciiva.com:443/pdfs/VipMasterIC/IC/YAGO/YAGO-S-A0008145938/YAGO-S-A0008145938-1.pdf?src-supplier=IHS+Markit, ComponentLink2Description=https://datasheet.ciiva.com/2458/pyu-r-int-thick-7-2458887.pdf?src-supplier=Digikey, ComponentLink2URL=https://datasheet.ciiva.com/2458/pyu-r-int-thick-7-2458887.pdf?src-supplier=Digikey, ComponentLink3Description=https://datasheet.ciiva.com/2458/pyu-r-int-thick-7-2458888.pdf?src-supplier=Digikey, ComponentLink3URL=https://datasheet.ciiva.com/2458/pyu-r-int-thick-7-2458888.pdf?src-supplier=Digikey, ComponentLink4Description=https://datasheet.ciiva.com/2458/pyu-r-int-thick-7-2458889.pdf?src-supplier=Digikey, ComponentLink4URL=https://datasheet.ciiva.com/2458/pyu-r-int-thick-7-2458889.pdf?src-supplier=Digikey, ComponentLink5Description=https://datasheet.ciiva.com/17017/pyu-rc1206-51-rohs-l-4-17017071.pdf?src-supplier=Future+Electronics, ComponentLink5URL=https://datasheet.ciiva.com/17017/pyu-rc1206-51-rohs-l-4-17017071.pdf?src-supplier=Future+Electronics, Construction=Chip, JESD-609 Code=e3, Manufacturer Part Number=RC1206JR-071RL, Mounting Technology="Surface Mount", Packaging="Tape and Reel", Pins=2, Pricing="5000=0,0043, 20000=0,0041, 75000=0,0039, 200000=0,0038, 500000=0,0036 (USD)", Reach SVHC Compliant=Yes, RoHS=Yes, RoHS Compliant=Yes, Stock=85000, Supplier="Future Electronics", Technology="METAL GLAZE/THICK FILM", Terminal Finish=Nickel, Termination=Wraparound
T1: library part "EE-22 SMPS_TRAFO", "SMPS Transformer", Manufacturer="Wurth Electronics Midcom", Supplier Part Number=710-750341599, Category=Transformers, ComponentLink1Description=https://datasheet.ciiva.com:443/pdfs/VipMasterIC/IC/MIDC/MIDC-S-A0004708843/MIDC-S-A0004709866-1.pdf?src-supplier=IHS+Markit, ComponentLink1URL=https://datasheet.ciiva.com:443/pdfs/VipMasterIC/IC/MIDC/MIDC-S-A0004708843/MIDC-S-A0004709866-1.pdf?src-supplier=IHS+Markit, ComponentLink2Description=https://datasheet.ciiva.com/18573/750341599-dwg-18573719.pdf?src-supplier=Digikey, ComponentLink2URL=https://datasheet.ciiva.com/18573/750341599-dwg-18573719.pdf?src-supplier=Digikey, Manufacturer Part Number=750341599, Pricing="1=4,99, 10=4,92, 50=4,74, 100=4,02, 1000=3,52, 10000=2,82 (USD)", Reach SVHC Compliant=Yes, RoHS=Yes, RoHS Compliant=No, Supplier=Mouser, Transformer Type="SMPS TRANSFORMER"
VR1: library part "820513011 Varistor", "Varistor, 385V, 70J, Through Hole Mount", Circuit DC Voltage-Max=385V, Circuit RMS Voltage-Max=300V, Energy Absorbing Capacity-Max=70J, Manufacturer="Wurth Electronics", Max Operating Temperature=125°C, Min Operating Temperature=-40°C, Package Shape=Disk, Power=400mW, Resistor Type=VARISTOR, Supplier Part Number=710-820513011, Category=Varistors, ComponentLink1Description=https://datasheet.ciiva.com:443/pdfs/VipMasterIC/IC/MIDC/MIDC-S-A0007237670/MIDC-S-A0007085238-1.pdf?src-supplier=IHS+Markit, ComponentLink1URL=https://datasheet.ciiva.com:443/pdfs/VipMasterIC/IC/MIDC/MIDC-S-A0007237670/MIDC-S-A0007085238-1.pdf?src-supplier=IHS+Markit, ComponentLink2Description=http://www.farnell.com/datasheets/2372859.pdf?src-supplier=Farnell, ComponentLink2URL=http://www.farnell.com/datasheets/2372859.pdf?src-supplier=Farnell, ComponentLink3Description=https://katalog.we-online.de/pbs/datasheet/820513011.pdf?src-supplier=Digikey, ComponentLink3URL=https://katalog.we-online.de/pbs/datasheet/820513011.pdf?src-supplier=Digikey, Manufacturer Part Number=820513011, Mounting Technology="Through Hole", Pins=2, Pricing="1=0,72, 10=0,493, 50=0,405, 100=0,405, 1000=0,393, 10000=0,393 (USD)", Reach SVHC Compliant=Yes, RoHS=Yes, RoHS Compliant=Yes, Stock=21997, Supplier=Mouser, Terminal Placement=Radial, Termination=Wire

## Via types
v1: diameter 50, hole 30, Top Layer to Bottom Layer, 2 vias

## Nets (pads, with @x,y where several pads share a name; then routed paths per layer and width w, separated by ;. In a path a pad name is that pad's centre, name@x,y a point inside that pad or via, vN(x,y) a via of type N, cw(c..) or ccw(c..) an arc to the next point about the centre after c; other vN are vias at no path point)
AC_1: F1.2 J2.2
AC_2: BR1.2 J2.1 VR1.2 | length 625.2
  Top Layer w70: VR1.2 719.61,-506.77 BR1.2 1035.68,-398.54 1035.68,-245.43 J2.1
"Auxulariy +": D2.2 R2.2 T1.5 | length 1660.2
  Top Layer w40: R2.2 310.63,-1506.69
  Top Layer w50: 310.63,-1506.69 D2.2
  Bottom Layer w50: T1.5 438.03,-2053.31 403.31,-2053.31 220,-1870 220,-1480 493.31,-1206.69 D2.2
IN_GND: BR1.4 C1.2 C2.2 C3.2 C5.2 C6.2 L1.2 L1.3 R3.1 R5.2 T1.4 U1.7 U1.8 | length 5142.3
  Top Layer w30: C6.2 488.21,-1595.59 530,-1553.8 v1(530,-1540)
  Top Layer w50: R5.2 447.68,-1925.16 T1.4
  Top Layer w60: 310.63,-1831 R3.1
  Top Layer w70: 310.63,-1831 v1(357.73,-1878.1) ; T1.4 586.01,-2063.49 586.01,-2176.32 627.02,-2217.32 C3.2 1704.17,-2217.32 C2.2 1869.06,-1800.94 1988.19,-1681.81 L1.3 ; C5.2@860.98,-1420.98 919.49,-1479.49 U1.8@919.49,-1589.37 ; BR1.4 1205.79,-780 1818.05,-780 1859.06,-738.99 C1.2
  Bottom Layer w50: C1.2 1859.06,-845.28 L1.2
  Bottom Layer w70: v1(357.73,-1878.1) 427.49,-1878.1 530,-1775.59 v1(530,-1540) 741.4,-1540 855.63,-1425.77 855.63,-1399.33 C5.2
INV: R2.1 R3.2 U1.3 | length 393.6
  Top Layer w30: R3.2 315.04,-1690 U1.3 U1.3
NetBR1_1: BR1.1 F1.1 VR1.1 | length 1198.6
  Top Layer w70: F1.1 591.1,-842.99 VR1.1 673.7,-650 989.33,-650 BR1.1
NetBR1_3: BR1.3 C1.1 L1.1 | length 1397.2
  Top Layer w70: BR1.3 927.44,-1027.44 990,-1090 1533.8,-1090 1574.8,-1048.99 L1.1
  Bottom Layer w50: L1.1 1574.8,-639.84 C1.1
NetC2_1: C2.1 C4.2 L1.4 R1.2 T1.1 | length 1792.1
  Top Layer w70: T1.1 1664.1,-2060.31 1671.97,-2052.44 C2.1 1672.2,-1812.99 1574.8,-1715.59 L1.4 1376.3,-1277.87 C4.2
NetC4_1: C4.1 D1.1 R1.1
NetC5_1: C5.1 D2.1 U1.1 | length 387.1
  Top Layer w40: 700,-1540 700,-1587.6 U1.1
  Top Layer w50: 700,-1540 700,-1512.6 D2.1 616.28,-1423.23 644.54,-1394.96 C5.1
NetC6_1: C6.1 U1.2 | length 153.9
  Top Layer w30: C6.1 612.43,-1604.96 647.47,-1640 U1.2 U1.2
NetR5_1: R5.1 U1.4 | length 183.5
  Top Layer w30: R5.1 684.79,-1784.96 702.36,-1767.39 U1.4
"Rec +": D3.1 D3.2 T1.8 | length 668.1
  Top Layer w70: D3.1 704.41,-2614.96 T1.8
Snubber: D1.2 T1.2 U1.5 U1.6 | length 333.9
  Top Layer w60: T1.2 858.43,-1811.06 U1.5@918.31,-1751.18
VOUT+: C7.1 D3.K J1.2 R4.2 | length 1640.5
  Top Layer w40: 1383.58,-2876.42 R4.2
  Top Layer w60: J1.2 1162.28,-3267.72 1383.58,-3046.42 1383.58,-2876.42
  Bottom Layer w60: C7.1 375.51,-3030 924.85,-3030 1015.65,-3120.8 1015.65,-3256.6 J1.2
VOUT-: C3.1 C7.2 J1.1 R4.1 T1.7 | length 2158.8
  Top Layer w70: C7.2 751.99,-3326.77 811.05,-3267.72 J1.1 ; T1.7 826.77,-2934.17 J1.1 ; C3.1 1310.63,-2647.45 1277.68,-2680.41 R4.1 1274.92,-2824.96 832.17,-3267.72 J1.1
pads on no net: T1.3 T1.6 T1.9

## Polygon pours and split planes (outlines as drawn)
AC_1 on Top Layer "AC_1_L01_P000" (solid, remove dead copper, pour order 0): 888.11,-118.11 944.88,-174.88 944.88,-285.12 875.67,-354.33 264.33,-354.33 196.85,-286.85 196.85,-183.15 261.89,-118.11

## Keep-outs
Keep-Out Layer:
  pour cut-out: 240,-2395.02 cw(c240,-2370) 240,-2344.99 1460,-2344.99 cw(c1460,-2370) 1485.01,-2370 cw(c1460,-2370) 1460,-2395.02
  lines w50: 240,-2370 1460,-2370

## Other copper
Top Layer:
  region net VOUT+: 50,-2700 260,-2700 260,-3010 330,-3080 330,-3180 310,-3200 250,-3200 50,-3000 50,-2960
  region net "Rec +": 60,-2590 250,-2590 250,-2650 60,-2650
  region net NetC2_1: 990,-1300 1200,-1300 1200,-1250 990,-1250
  region net NetC4_1: 980,-1360 1210,-1360 1210,-1440 1160,-1490 1160,-1540 1130,-1570 1050,-1570 1020,-1540 1020,-1490 980,-1450
  region net IN_GND: 890,-1570 890,-1658.27 950,-1658.27 950,-1570
  region net Snubber: 890,-1672.97 952.97,-1672.97 970,-1690 1120,-1690 1140,-1710 1140,-1760 1120,-1780 960,-1780 940,-1760 890,-1760
  region net IN_GND: 280,-1740 470,-1740 470,-1830 280,-1830
  region net INV: 280,-1600 340,-1600 340,-1710 280,-1710

## Silkscreen, mask and mechanical layers (free items; w line width, h text height)
Drill Drawing:
  the board outline again, w7.87